# EAGLE board projeto1 (EAGLE 9.6.2)

Size 122.86 x 59.68 mm. Coordinates in mm from the lower left corner, seen from the top.
Outline: 0,0 122.86,0 122.86,59.68 0,59.68 0,0
Copper layers (1*16): Top 0.035mm / dielectric 1.5mm / Bottom 0.035mm
Design rules "default *": minimum track width 50mil, minimum drill 0.35mm, track to track 1mm, track to pad 1mm, pad to pad 6mil, via to via 6mil, smd to smd 6mil, copper to edge 40mil, drill to drill 6mil, minimum pad ring 10mil, minimum via ring 8mil, stop-mask expansion 4mil, vias tented up to drill 0mil, thermal gap 10mil

## Footprints (pad centres in the part's own frame; a part is rotated, then mirrored left to right if it is on the bottom)
ESP32-DEVKITV1 = drill 1 pad 1.93: 3V3 0,0; D1 30.48,0; D2 7.62,0; D3 27.94,0; D4 10.16,0; D5 17.78,0; D12 7.62,25.4; D13 5.08,25.4; D14 10.16,25.4; D15 5.08,0; D16 12.7,0; D17 15.24,0; D18 20.32,0; D19 22.86,0; D21 25.4,0; D22 33.02,0; D23 35.56,0; D25 17.78,25.4; D26 15.24,25.4; D27 12.7,25.4; D32 22.86,25.4; D33 20.32,25.4; D34 27.94,25.4; D35 25.4,25.4; EN 35.56,25.4; GND 2.54,25.4; GND@1 2.54,0; VIN 0,25.4; VN 30.48,25.4; VP 33.02,25.4
DEVICE_FOOTPRINT = drill 1: CSB 1.27,-7.62; GND 8.89,-7.62; SCL -2.54,-7.62; SDA -6.35,-7.62; SDO 5.08,-7.62; VCC -10.16,-7.62

## Placement (x,y rotation side)
BOARD1  ESP32DEVKITV1  [ESP32-DEVKITV1]  58.42,46.99 270 top
U$1  DEVICE1  [DEVICE_FOOTPRINT]  25.4,30.48 90 top

## Library data of the parts
BOARD1 = ESP32-DEVKITV1
U$1 = Cactus_Library

## Nets
GND: BOARD1.GND U$1.GND
N$1: BOARD1.D23 U$1.SDA
N$2: BOARD1.D19 U$1.SDO
N$3: BOARD1.D18 U$1.SCL
N$5: BOARD1.D5 U$1.CSB
VCC: BOARD1.VIN U$1.VCC

## Tracks (layer width: path | path; a pad name or v marks a point on that pad's centre or on a via)
GND  (1 unrouted)
N$1  (1 unrouted)
N$2  (1 unrouted)
N$3  (1 unrouted)
N$5  (1 unrouted)
VCC  (1 unrouted)